# Altium PCB NodeMCU.PcbDoc
Units mm, origin at the board's own origin, x right, y up, seen from the top; angles counter-clockwise.
Board outline 100.36 x 67.08 mm, 2 copper layers (Top Layer, Bottom Layer); 39 components, 39 nets, 222 pads, 17 vias.
Unrouted connection lines stored in the file: 2.
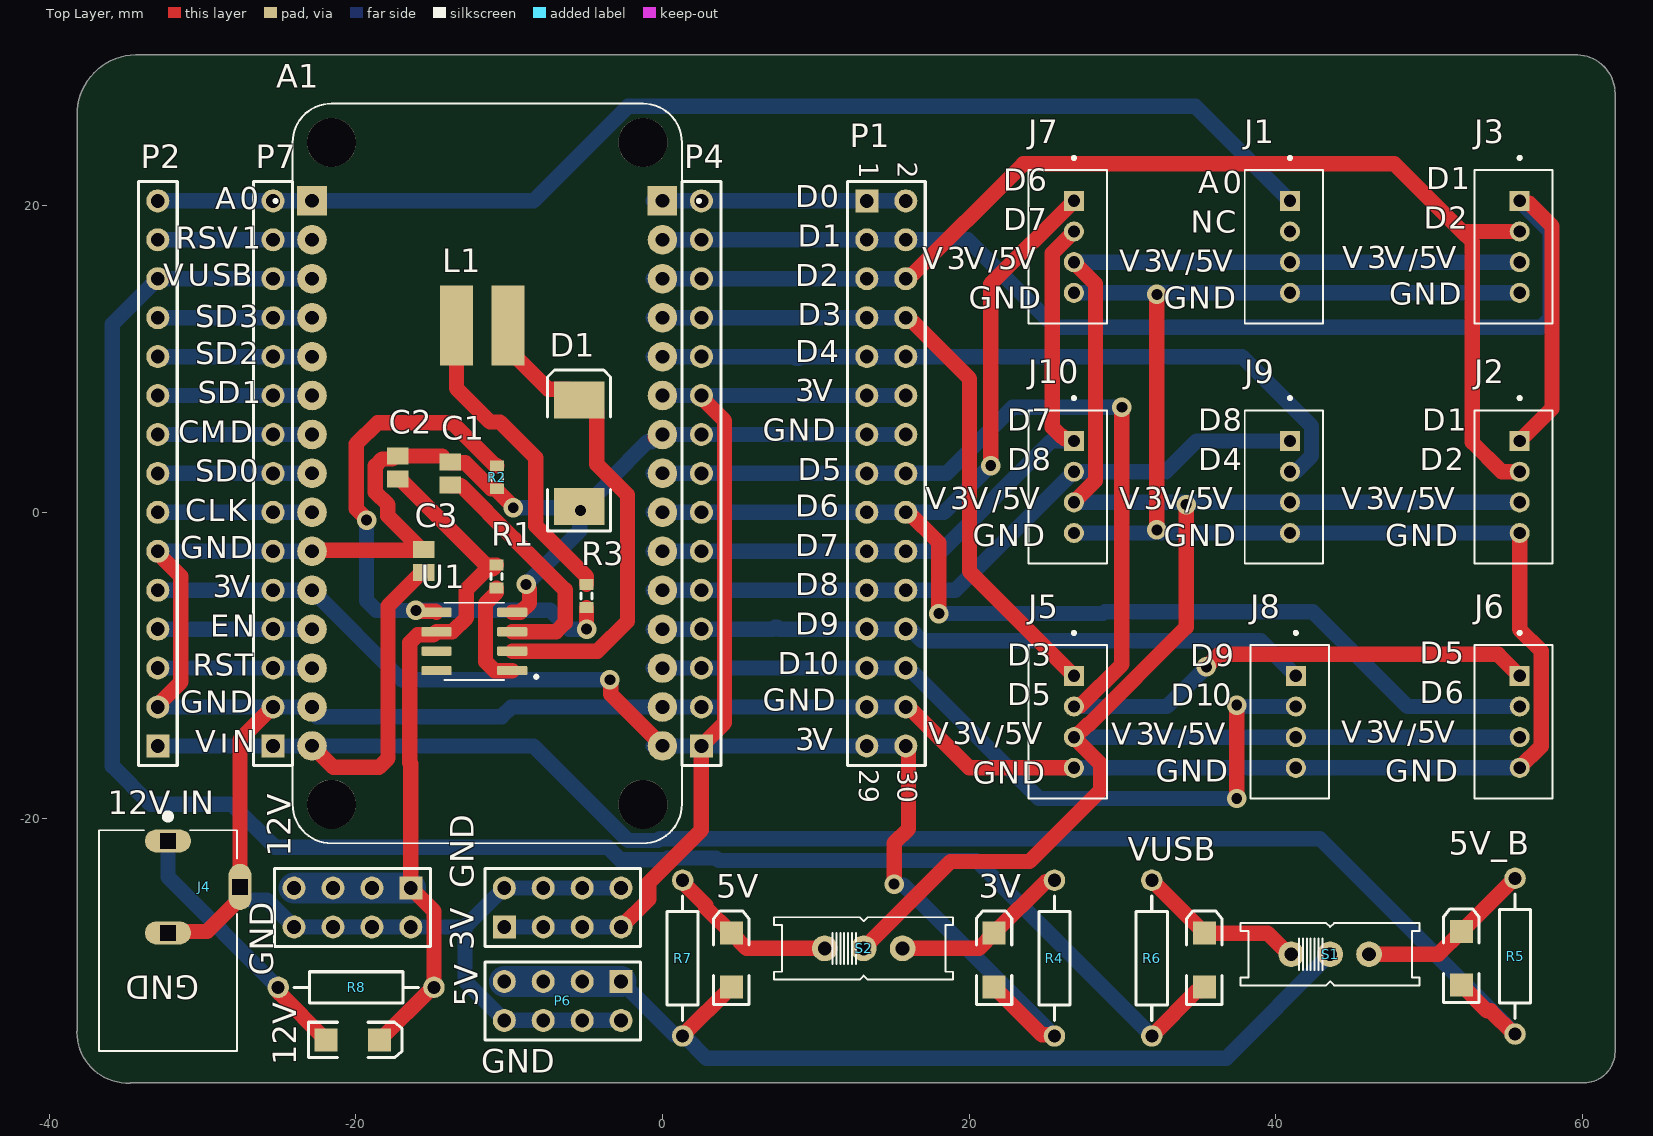
[diagram p0: Top Layer view]
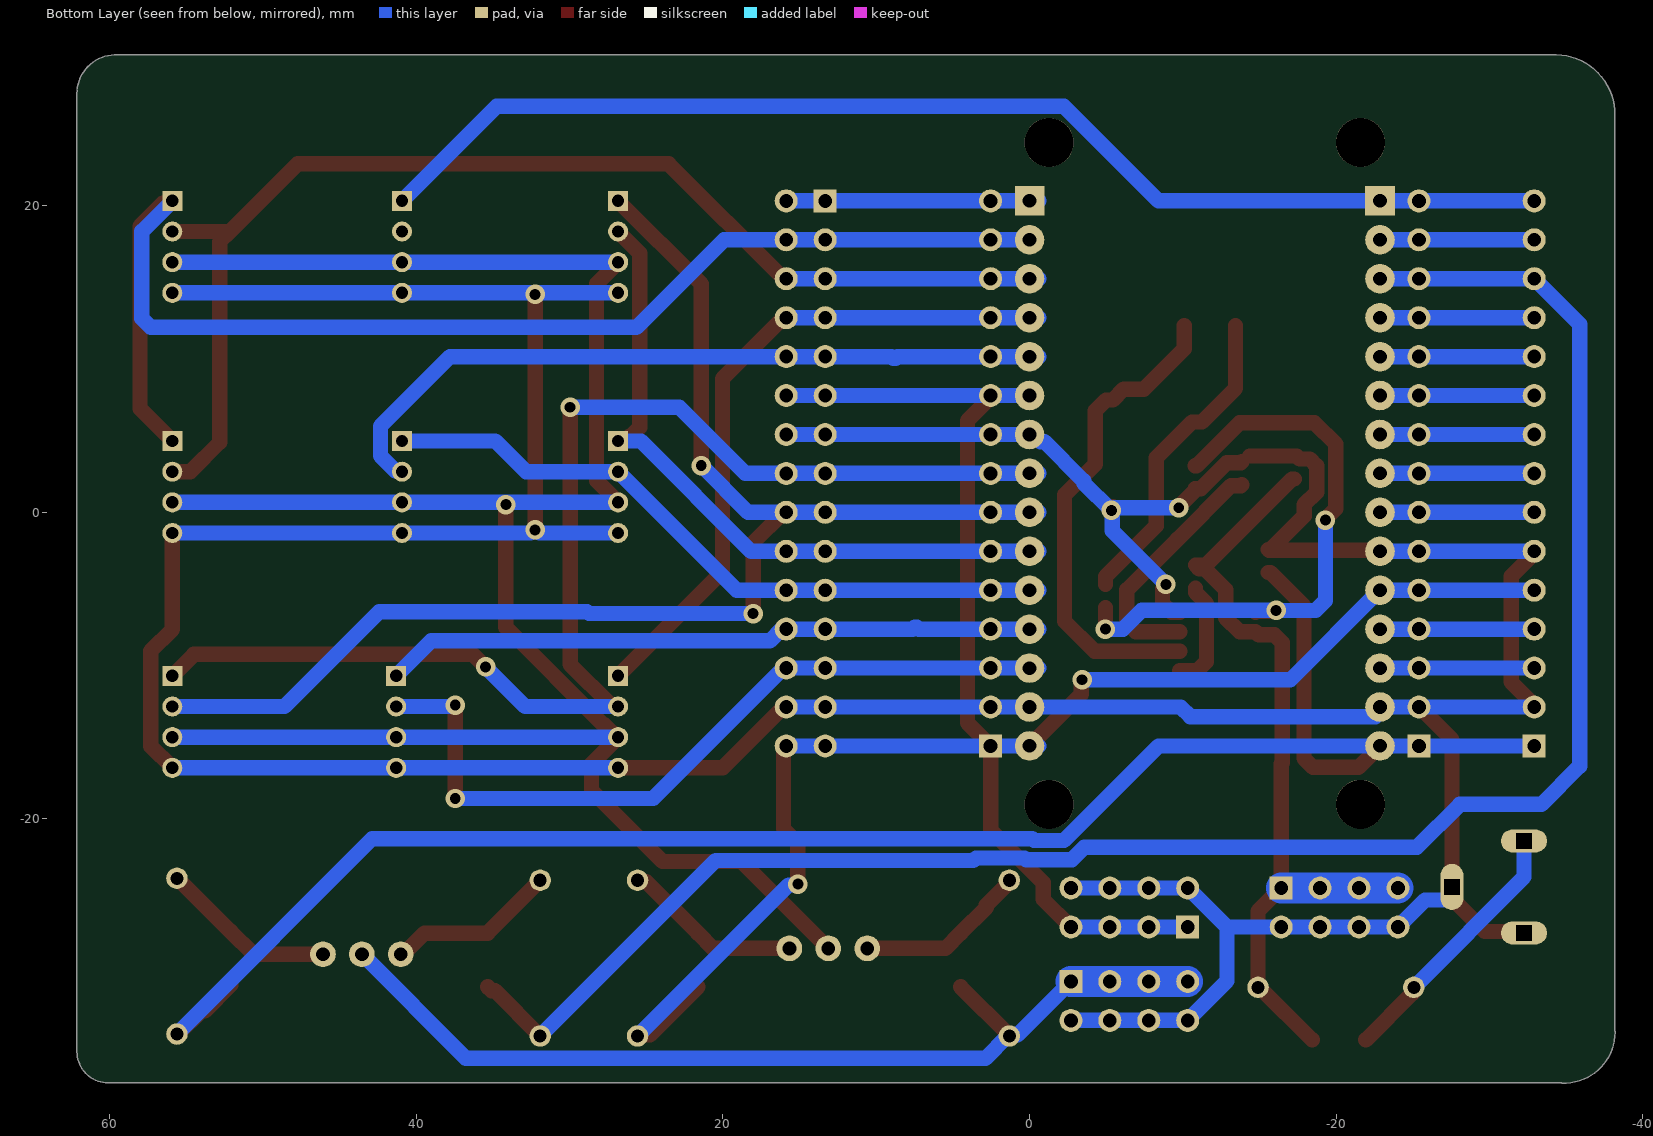
[diagram p1: Bottom Layer view, seen from below]

## Layer stack, top to bottom
Top Solder: solder mask 0.0102, Solder Resist, Dk 3.5
Top Layer: signal copper 0.0356
Dielectric 1: dielectric 0.32, FR-4, Dk 4.8
Bottom Layer: signal copper 0.0356
Bottom Solder: solder mask 0.0102, Solder Resist, Dk 3.5

## Board outline
-38.203,-33.909 ccw(c-34.878,-33.909) -34.745,-37.232 ccw(c-34.75,-37.104) -34.681,-37.211 60.117,-37.211 60.118,-37.211 ccw(c60.118,-35.179) 62.151,-35.179 ccw(c62.023,-35.179) 62.148,-35.155 ccw(c62.023,-35.132) 62.151,-35.132 62.151,27.175 ccw(c59.61,27.305) 62.154,27.305 ccw(c59.61,27.305) 59.48,29.845 -34.37,29.845 ccw(c-34.37,29.718) -34.373,29.845 cw(c-34.371,29.731) -34.372,29.845 -34.373,29.845 ccw(c-34.306,25.971) -38.18,25.907 ccw(c-33.971,25.977) -38.18,25.906 -38.18,25.907 -38.18,-33.836 ccw(c-38.076,-33.909)

## Design rules (kind name [scope] priority, off if disabled: settings)
Clearance [All] p1: gap=0.254 ignorepadtopadclearanceinfootprint=FALSE except(0: Arc-Hole Track-Hole SMDPad-Hole THPad-Hole Via-Hole Fill-Hole Poly-Hole Region-Hole Text-Hole)
ComponentClearance [All] p1 off: gap=0.254 collisioncheckmode=3 verticalgap=0.254 showdistances=FALSE
Height [All] p1 off: minheight=0 maxheight=25.4 prefheight=12.7
PolygonConnect [All] p1: connectstyle=Relief reliefconductorwidth=0.254 reliefentries=4 polygonreliefangle="90 Angle" airgapwidth=0.254
RoutingVias [All] p1: holewidth=0.711 width=1.27 viastyle="Through Hole" minholewidth=0.711 minwidth=1.27 maxholewidth=0.711 maxwidth=1.27
SolderMaskExpansion [All] p1: expansion=0.102 istentingtop=FALSE
Width [All] p1: maxlimit=10 minlimit=0.254 preferedwidth=1 minimp=50.000000 maximp=50.000000 favimp=50.000000
28 further rules are at their usual default settings.

## Classes and differential pairs
component class "node MCU": 3V "5V " 5V_B 12V A1 C1 C2 C3 D1 J1 J2 J3 J4 J5 J6 J7 J8 J9 J10 L1 P1 P2 P4 P6 P7 R1 R2 R3 R4 R5 R6 R7 R8 S1 S2 U1 VUSB

## Components (designator, comment, footprint, x,y, rotation, side; value= is the part's Value field where it differs from the comment)
3V "LED2" 3.2X1.6X1.1 21.637,-29.21 r90 top (schematic designator D2)
3V "Header 4X2" HDR2X4 -10.318,-27.051 r0 top (schematic designator P5)
5V "LED2" 3.2X1.6X1.1 4.492,-29.21 r90 top (schematic designator D5)
5V_B "LED2" 3.2X1.6X1.1 52.117,-29.083 r90 top (schematic designator D3)
12V "LED2" 3.2X1.6X1.1 -20.193,-34.417 r0 top (schematic designator D6)
12V "Header 4X2" HDR2X4 -16.414,-24.511 r180 top (schematic designator P8)
A1 "113990105" SEEED_113990105 -11.43,2.54 r0 top
C1 "Cap Pol3" C0805 -13.843,2.54 r90 top value=100pF
C2 "Cap Pol3" C0805 -17.272,2.921 r270 top value=100pF
C3 "Cap Pol3" C0805 -15.574,-3.175 r90 top value=100pF
D1 "Diode" SMC -5.438,3.856 r90 top
J1 "110990030" SEEED_110990030 40.941,17.32 r270 top
J2 "110990030" SEEED_110990030 55.927,1.651 r270 top
J3 "110990030" SEEED_110990030 55.927,17.32 r270 top
J4 "PJ-102A" CUI_PJ-102A -32.258,-27.94 r270 top
J5 "110990030" SEEED_110990030 26.844,-13.668 r270 top
J6 "110990030" SEEED_110990030 55.927,-13.668 r270 top
J7 "110990030" SEEED_110990030 26.844,17.32 r270 top
J8 "110990030" SEEED_110990030 41.322,-13.668 r270 top
J9 "110990030" SEEED_110990030 40.941,1.651 r270 top
J10 "110990030" SEEED_110990030 26.844,1.651 r270 top
L1 "SD12-4R7-R" INDM5252X120N -11.764,12.192 r0 top
P1 "Header 15X2" HDR2X15 13.335,20.32 r270 top
P2 "Header 15" HDR1X15 -32.924,-15.24 r90 top
P4 "Header 15" HDR1X15 2.54,-15.24 r90 top
P6 "Header 4X2" HDR2X4 -2.698,-30.607 r180 top
P7 "Header 15" HDR1X15 -25.4,-15.24 r90 top
R1 "Res3" J1-0603 -10.822,-4.191 r270 top value=1K
R2 "Res3" J1-0603 -10.795,2.286 r270 top value=1K
R3 "Res3" J1-0603 -4.953,-5.461 r270 top value=1K
R4 "Res2" AXIAL-0.4 25.574,-29.083 r90 top value=1K
R5 "Res2" AXIAL-0.4 55.626,-28.956 r90 top value=1K
R6 "Res2" AXIAL-0.4 31.924,-29.083 r90 top value=1K
R7 "Res2" AXIAL-0.4 1.317,-29.083 r90 top value=1K
R8 "Res2" AXIAL-0.4 -19.986,-30.988 r0 top value=1K
S1 "EG1218" EG1218 43.561,-28.829 r0 top
S2 "EG1218" EG1218 13.128,-28.448 r0 top
U1 "MC34063ADR" SOIC127P599X175-8N -12.272,-8.423 r180 top
VUSB "LED2" 3.2X1.6X1.1 35.353,-29.21 r90 top (schematic designator D4)

## Footprints (in the part's own frame and the unit in brackets; to place one, negate y for a bottom-side part, rotate by r counter-clockwise, add the part's x,y. Pads: shape width x height; smd on the part's side, far side on the other; paste and mask are expansions set on the pad)
3.2X1.6X1.1 [mm] "SMT LED; 2 Flat Leads"
  rect 1.5x1.5 smd: 1(-1.75,0) 2(1.75,0)
  silkscreen extent -2.9,-1.15 3.2,1.15
AXIAL-0.4 [mm] "Axial Device, Thru-Hole; 2 Leads; 0.4 in Pin Spacing"
  round 1.4 hole 0.85: 1(-5.08,0) 2(5.08,0)
  silkscreen extent -4.06,-1.02 4.06,1.02
C0805 [mm] "Chip Capacitor, Body 2.0x1.3mm, IPC High Density"
  rect 1.1x1.4 smd: 1(-0.75,0) 2(0.75,0)
  body extent -1.1,-0.72 1.1,0.72, height 1.4
CUI_PJ-102A [mm]
  oval 1.508x3.016 hole 1 square: 1(-6.5,0) 2(-0.5,0)
  oval 3.016x1.508 hole 1 square: 3(-3.5,4.7)
  silkscreen extent -8.3,-4.5 7.2,4.5, body extent -7.2,-4.5 7.2,4.9, height 11
EG1218 [mil]
  round 66 hole 35.43: O(-100,0) P(0,0) S(100,0)
  silkscreen extent -230,-80 230,80, body extent -228,-276 228,201, height 79
HDR1X15 [mm] "Connector; Header; 15 Position"
  rect 1.5x1.5 hole 0.9: 1(0,0)
  round 1.5 hole 0.9: 2(2.54,0) 3(5.08,0) 4(7.62,0) 5(10.16,0) 6(12.7,0) 7(15.24,0) 8(17.78,0) 9(20.32,0) 10(22.86,0) 11(25.4,0) 12(27.94,0) 13(30.48,0) 14(33.02,0) 15(35.56,0)
  silkscreen extent -1.27,-1.27 36.83,1.27
HDR2X4 [mm] "Connector; Header; 4x2 Position"
  rect 1.5x1.5 hole 0.9: 1(0,0)
  round 1.5 hole 0.9: 2(0,2.54) 3(2.54,0) 4(2.54,2.54) 5(5.08,0) 6(5.08,2.54) 7(7.62,0) 8(7.62,2.54)
  silkscreen extent -1.27,-1.27 8.89,3.81
HDR2X15 [mm] "Connector; Header; 15x2 Position"
  rect 1.5x1.5 hole 0.9: 1(0,0)
  round 1.5 hole 0.9: 2(0,2.54) 3(2.54,0) 4(2.54,2.54) 5(5.08,0) 6(5.08,2.54) 7(7.62,0) 8(7.62,2.54) 9(10.16,0) 10(10.16,2.54) 11(12.7,0) 12(12.7,2.54) 13(15.24,0) 14(15.24,2.54) 15(17.78,0) 16(17.78,2.54) 17(20.32,0) 18(20.32,2.54) 19(22.86,0) 20(22.86,2.54) 21(25.4,0) 22(25.4,2.54) 23(27.94,0) 24(27.94,2.54) 25(30.48,0) 26(30.48,2.54) 27(33.02,0) 28(33.02,2.54) 29(35.56,0) 30(35.56,2.54)
  silkscreen extent -1.27,-1.27 36.83,3.81
INDM5252X120N [mil]
  rect 85x205 smd: 1(-66,0) 2(66,0)
J1-0603 [mm] "Chip Resistor, Body 1.6x0.8mm, IPC High Density"
  rect 0.7x0.9 smd: 1(-0.75,0) 2(0.75,0)
  silkscreen extent -0.2,-0.35 0.2,0.35, body extent -0.85,-0.48 0.85,0.48, height 0.9
SEEED_110990030 [mm]
  rect 1.308x1.308 hole 0.8: 1(-3,0)
  round 1.308 hole 0.8: 2(-1,0) 3(1,0) 4(3,0)
  silkscreen extent -5.9,-2.95 5,2.15
SEEED_113990105 [mm]
  rect 1.93x1.93 / inner round 1.93 / far side rect 1.93x1.93 hole 0.889: J1_1(-11.43,17.78) J2_1(11.43,17.78)
  round 1.93 hole 0.889: J1_2(-11.43,15.24) J1_3(-11.43,12.7) J1_4(-11.43,10.16) J1_5(-11.43,7.62) J1_6(-11.43,5.08) J1_7(-11.43,2.54) J1_8(-11.43,0) J1_9(-11.43,-2.54) J1_10(-11.43,-5.08) J1_11(-11.43,-7.62) J1_12(-11.43,-10.16) J1_13(-11.43,-12.7) J1_14(-11.43,-15.24) J1_15(-11.43,-17.78) J2_2(11.43,15.24) J2_3(11.43,12.7) J2_4(11.43,10.16) J2_5(11.43,7.62) J2_6(11.43,5.08) J2_7(11.43,2.54) J2_8(11.43,0) J2_9(11.43,-2.54) J2_10(11.43,-5.08) J2_11(11.43,-7.62) J2_12(11.43,-10.16) J2_13(11.43,-12.7) J2_14(11.43,-15.24) J2_15(11.43,-17.78)
  round 3.2 hole 3.2 unplated: ""(-10.16,-21.59) ""(-10.16,21.59) ""(10.16,-21.59) ""(10.16,21.59)
  silkscreen extent -13.91,-24.13 13.91,24.13
SMC [mm] "DO-214-AB/SMC; 2 C-Bend Leads; Body 7.9 x 5.9 mm, inc. leads (LxW)"
  rect 2.4x3.3 smd: 1(-3.475,0) 2(3.475,0)
  silkscreen extent -5.07,-2.05 5.43,2.05
SOIC127P599X175-8N [mm]
  rrect25% 1.97x0.6 smd: 1(-2.47,1.905) 2(-2.47,0.635) 3(-2.47,-0.635) 4(-2.47,-1.905) 5(2.47,-1.905) 6(2.47,-0.635) 7(2.47,0.635) 8(2.47,1.905)
  silkscreen extent -4.14,-2.52 1.95,2.52

## Part data
3V 5V 5V_B 12V VUSB: "Typical RED, GREEN, YELLOW, AMBER GaAs LED", LatestRevisionDate=17-Jul-2002, LatestRevisionNote="Re-released for DXP Platform.", PackageDescription="SM LED; 2 Flat Leads", PackageReference=3.2X1.6X1.1, PackageVersion=Feb-2002, Published=8-Jun-2000, Publisher="Altium Limited"
3V 12V P6: "Header, 4-Pin, Dual row", LatestRevisionDate=17-Jul-2002, LatestRevisionNote="Re-released for DXP Platform.", Publisher="Altium Limited"
A1: "- ESP8266 Transceiver; 802.11 b/g (Wi-Fi, WiFi, WLAN) 2.4GHz Evaluation Board", Package=None, Availability="In Stock", Check_prices=https://www.snapeda.com/parts/113990105/Seeed+Technology+Co.%252C+Ltd/view-part/?ref=eda, MF="Seeed Technology Co., Ltd", MP=113990105, Price=None, Purchase-URL=https://pricing.snapeda.com/search/part/113990105/?ref=eda, SnapEDA_Link=https://www.snapeda.com/parts/113990105/Seeed+Technology+Co.%252C+Ltd/view-part/?ref=snap
C1 C2 C3: "Polarized Capacitor (Surface Mount)", LatestRevisionDate=29-May-2009, LatestRevisionNote="IPC-7351 Footprint Added.", PackageDescription="Chip Capacitor", PackageReference=C0805, Published=8-Jun-2000, Publisher="Altium Limited"
D1: "Default Diode", Code_JEDEC=DO-214-AB, LatestRevisionDate=17-Jul-2002, LatestRevisionNote="Re-released for DXP Platform.", PackageDescription="DO-214-AB/SMC; 2 C-Bend Leads; Body 7.9 x 5.9 mm, inc. leads (LxW)", PackageReference=SMC, PackageVersion=Sep-1996, Published=8-Jun-2000, Publisher="Altium Limited"
J1 J2 J3 J5 J6 J7 J8 J9 J10: "GROVE 2MM 4PIN VERT CONN 10PCS", Package=None, Arrow_Electronics-Purchase-URL=https://snapeda.com/shop?store=Arrow+Electronics&id=583576, Availability=Good, MF="Seeed Technology", Mouser-Purchase-URL=https://snapeda.com/shop?store=Mouser&id=583576, MP=110990030, Price=None, SnapEDA_Link=https://www.snapeda.com/parts/110990030/Seeed%20Technology%20Co.,%20Ltd/view-part/583576/?ref=snap
J4: "2.0 x 6.5 mm, 2.5 A, Horizontal, Through Hole, Tapered Pins, Dc Power Jack Connector", Package=None, Availability="In Stock", Check_prices=https://www.snapeda.com/parts/PJ-102A/CUI+Devices/view-part/?ref=eda, CUI_purchase_URL=https://www.cuidevices.com/product/interconnect/connectors/dc-power-connectors/jacks/pj-102a?utm_source=snapeda.com&utm_medium=referral&utm_campaign=snapedaBOM, MF="CUI Devices", MP=PJ-102A, Price=None, Purchase-URL=https://pricing.snapeda.com/search/part/PJ-102A/?ref=eda, SnapEDA_Link=https://www.snapeda.com/parts/PJ-102A/CUI+Devices/view-part/?ref=snap
L1: "POWER INDUCTOR", Package=None, Availability=Unavailable, MP=SD12-4R7-R, Price=None
P1: "Header, 15-Pin, Dual row", LatestRevisionDate=17-Jul-2002, LatestRevisionNote="Re-released for DXP Platform.", Publisher="Altium Limited"
P2 P4 P7: "Header, 15-Pin", LatestRevisionDate=17-Jul-2002, LatestRevisionNote="Re-released for DXP Platform.", Publisher="Altium Limited"
R1 R2 R3 R4 R5 R6 R7 R8: "Resistor", Published=8-Jun-2000, Publisher="Altium Limited"
  R1 R2 R3: LatestRevisionDate=29-May-2009, LatestRevisionNote="IPC-7351 Footprint Added.", PackageDescription="Chip Resistor", PackageReference=J1-0603
  R4 R5 R6 R7 R8: LatestRevisionDate=17-Jul-2002, LatestRevisionNote="Re-released for DXP Platform.", PackageDescription="Axial Device, Thru-Hole; 2 Leads; 0.4 in Pin Spacing", PackageReference=AXIAL-0.4
S1 S2: "Slide Switch SPDT Through Hole", Package=None, Availability="In Stock", Check_prices=https://www.snapeda.com/parts/EG1218/E-Switch/view-part/?ref=eda, MF=E-Switch, MP=EG1218, Price=None, Purchase-URL=https://pricing.snapeda.com/search/part/EG1218/?ref=eda, SnapEDA_Link=https://www.snapeda.com/parts/EG1218/E-Switch/view-part/?ref=snap
U1: "1.5-A Boost/Buck/Inverting Switching Regulator 8-SOIC 0 to 70", Package=None, Availability=Unavailable, MP=MC34063ADR, Price=None

## Via types
v1: diameter 1.27, hole 0.711, Top Layer to Bottom Layer, 17 vias

## Nets (pads, with @x,y where several pads share a name; then routed paths per layer and width w, separated by ;. In a path a pad name is that pad's centre, name@x,y a point inside that pad or via, vN(x,y) a via of type N, cw(c..) or ccw(c..) an arc to the next point about the centre after c; other vN are vias at no path point)
GND: 3V.2@-10.318,-24.511 3V.4 3V.6 3V.8 12V.2@-16.414,-27.051 12V.4 12V.6 12V.8 A1.J1_10 A1.J1_14 A1.J2_7 A1.J2_14 C1.2 C2.1 C3.2 D1.1 J1.4 J2.4 J3.4 J4.2 J4.3 J5.4 J6.4 J7.4 J8.4 J9.4 J10.4 P1.13 P1.14 P1.27 P1.28 P2.2 P2.6 P4.2 P4.9 P6.2 P6.4 P6.6 P6.8 P7.2 P7.6 R2.2 U1.4 | length 325.4
  Top Layer w1: P2.2 -32.924,-12.565 -31.42,-11.061 -31.42,-4.179 -32.924,-2.675 P2.6 ; J4.2 -32.161,-27.343 -29.707,-27.343 -27.558,-25.194 J4.3 -27.558,-14.832 -25.426,-12.7 P7.2 ; A1.J1_10 -22.795,-2.475 -15.624,-2.475 C3.2 -15.724,-2.425 -17.915,-0.234 -17.915,0.498 -18.726,1.309 -18.726,3.033 -18.284,3.475 -17.618,3.475 -17.422,3.671 C2.1 C1.2@-14.374,3.671 ; C1.2 -13.793,3.24 -12.865,3.24 -11.161,1.536 R2.2 -10.795,1.434 -9.734,0.372 v1(-9.734,0.299) ; U1.4 -9.262,-6.518 -8.676,-5.932 -8.676,-4.986 -8.89,-4.772 v1(-8.89,-4.699) ; D1.1 -5.334,0.277 v1(-5.334,0.127) ; A1.J2_7@-0.467,4.902 -0.178,4.902 A1.J2_7 ; P1.28@16.049,-12.7 20.017,-16.668 J5.4 ; v1(32.258,-1.143) v1(32.258,14.224) ; J6.4 55.927,-16.659 57.335,-15.251 57.335,-9.046 55.927,-7.638 J2.4
  Bottom Layer w1: P2.2 P7.2 -23.208,-12.7 -22.573,-13.335 -10.494,-13.335 -9.859,-12.7 A1.J2_14 P4.2 13.509,-12.7 P1.28@16.049,-12.7 ; P2.6 P7.6 A1.J1_10@-23.46,-2.54 ; J4.3 -27.558,-25.057 -27.323,-25.291 -25.794,-25.291 12V.8 12V.6 12V.4 -16.414,-27.051 -12.884,-27.051 ; v1(-9.734,0.299) -5.579,0.299 -5.407,0.127 v1(-5.334,0.127) ; v1(-8.89,-4.699) -5.386,-1.195 -5.386,0.075 v1(-5.334,0.127) ; P6.2 P6.4 P6.6 P6.8 -12.884,-30.581 -12.884,-27.051 ; 3V.8 3V.6 3V.4 -10.318,-24.511 -10.344,-24.511 -12.884,-27.051 ; P1.14@16.049,5.08 13.509,5.08 P4.9 -0.252,5.08 -0.717,4.615 -0.973,4.615 -3.534,2.054 -3.534,1.927 v1(-5.334,0.127) ; J5.4 J8.4 J6.4 ; J10.4 31.979,-1.349 32.185,-1.143 32.331,-1.143 32.537,-1.349 J9.4 J2.4 ; J7.4 32.089,14.32 32.185,14.224 v1(32.258,14.224) 32.331,14.224 32.427,14.32 J1.4 J3.4
NetA1_J1_1: A1.J1_1 J1.1 P2.15 P7.15 | length 78.4
  Bottom Layer w1: P2.15 P7.15 A1.J1_1@-23.46,20.32 ; A1.J1_1 -8.409,20.32 -2.245,26.484 34.777,26.484 J1.1
NetA1_J1_2: A1.J1_2 P2.14 P7.14 | length 9.5
  Bottom Layer w1: P2.14 -26,17.78 A1.J1_2@-23.46,17.78
NetA1_J1_3: A1.J1_3 P2.13 P7.13 R6.1 VUSB.1 | length 123
  Top Layer w1: R6.1 34.877,-31.21 35.103,-31.21 VUSB.1
  Bottom Layer w1: A1.J1_3 P7.13 P2.13 -35.886,12.278 -35.886,-16.565 -33.401,-19.05 -28.067,-19.05 -25.273,-21.844 -3.578,-21.844 -2.764,-22.658 0.224,-22.658 0.333,-22.549 3.499,-22.549 3.667,-22.717 20.478,-22.717 R6.1
NetA1_J1_4: A1.J1_4 P2.12 P7.12 | length 9.5
  Bottom Layer w1: P2.12 -26,12.7 A1.J1_4@-23.46,12.7
NetA1_J1_5: A1.J1_5 P2.11 P7.11 | length 9.5
  Bottom Layer w1: P2.11 -26,10.16 A1.J1_5@-23.46,10.16
NetA1_J1_6: A1.J1_6 P2.10 P7.10 | length 9.5
  Bottom Layer w1: P2.10 -26,7.62 A1.J1_6@-23.46,7.62
NetA1_J1_7: A1.J1_7 P2.9 P7.9 | length 9.5
  Bottom Layer w1: P2.9 -26,5.08 A1.J1_7@-23.46,5.08
NetA1_J1_8: A1.J1_8 P2.8 P7.8 | length 9.5
  Bottom Layer w1: P2.8 -26,2.54 A1.J1_8@-23.46,2.54
NetA1_J1_9: A1.J1_9 P2.7 P7.7 | length 9.5
  Bottom Layer w1: P2.7 -26,0 A1.J1_9@-23.46,0
NetA1_J1_11: 3V.1 3V.3 3V.5 3V.7 A1.J1_11 A1.J2_6 A1.J2_15 P1.11 P1.12 P1.29 P1.30 P2.5 P4.1 P4.10 P7.5 R4.1 | length 145.3
  Top Layer w1: v1(-3.429,-10.922) -3.377,-10.974 -3.377,-11.863 A1.J2_15 ; 3V.7 -0.889,-25.242 -0.889,-24.153 2.54,-20.724 P4.1 4.044,-13.736 4.044,5.981 2.54,7.485 P4.10 ; v1(15.113,-24.257) 15.113,-21.582 16.049,-20.646 P1.30@16.049,-15.24 ; 3V.1@21.637,-30.96 24.764,-34.086 25.498,-34.086 R4.1
  Bottom Layer w1: P2.5 P7.5 A1.J1_11 -17.018,-10.922 v1(-3.429,-10.922) ; 3V.1@-10.318,-27.051 3V.3 3V.5 3V.7 ; A1.J2_15@-0.6,-15.24 A1.J2_15 P4.1 13.509,-15.24 P1.30@16.049,-15.24 ; A1.J2_6 P4.10 13.509,7.62 P1.12@16.049,7.62 ; v1(15.113,-24.257) 15.165,-24.309 15.72,-24.309 R4.1
NetA1_J1_12: A1.J1_12 P2.4 P7.4 | length 9.5
  Bottom Layer w1: P2.4 -26,-7.62 A1.J1_12@-23.46,-7.62
NetA1_J1_13: A1.J1_13 P2.3 P7.3 | length 9.5
  Bottom Layer w1: P2.3 -26,-10.16 A1.J1_13@-23.46,-10.16
NetA1_J1_15: 5V_B.1 A1.J1_15 C3.1 P2.1 P7.1 R5.1 | length 119.6
  Top Layer w1: A1.J1_15 -21.463,-16.637 -18.493,-16.637 -17.907,-16.051 -17.907,-6.108 -15.724,-3.925 C3.1 ; 5V_B.1 53.805,-32.521 54.03,-32.521 55.544,-34.036 R5.1
  Bottom Layer w1: P2.1 P7.1 A1.J1_15@-23.46,-15.24 ; A1.J1_15 -8.409,-15.24 -2.245,-21.404 -0.295,-21.404 -0.186,-21.295 42.885,-21.295 R5.1
NetA1_J2_1: A1.J2_1 P1.1 P1.2 P4.15 | length 16.6
  Bottom Layer w1: A1.J2_1@-0.6,20.32 1.94,20.32 13.509,20.32 P1.2@16.049,20.32
NetA1_J2_2: A1.J2_2 J2.1 J3.1 P1.3 P1.4 P4.14 | length 86.7
  Top Layer w1: J2.1 58.039,6.763 58.039,18.669 56.542,20.166 56.081,20.166 J3.1
  Bottom Layer w1: A1.J2_2 P4.14 13.509,17.78 16.049,17.78 19.939,17.78 25.654,12.065 57.326,12.065 57.912,12.651 57.912,18.335 J3.1
NetA1_J2_3: A1.J2_3 J2.2 J3.2 P1.5 P1.6 P4.13 | length 79.3
  Top Layer w1: P1.6@16.049,15.24 23.542,22.733 47.752,22.733 52.165,18.32 ; J2.2@55.844,2.651 54.753,2.651 52.832,4.572 52.832,17.653 52.165,18.32 ; J3.2 52.165,18.32
  Bottom Layer w1: A1.J2_3@-0.6,15.24 13.509,15.24 P1.6@16.049,15.24
NetA1_J2_4: A1.J2_4 J5.1 P1.7 P1.8 P4.12 | length 44.7
  Top Layer w1: P1.8@16.049,12.7 20.028,8.721 20.028,-3.852 J5.1
  Bottom Layer w1: A1.J2_4@-0.6,12.7 13.509,12.7 P1.8@16.049,12.7 ; J5.1 J5.1@26.971,-10.541
NetA1_J2_5: A1.J2_5 J9.2 P1.9 P1.10 P4.11 | length 48.3
  Bottom Layer w1: A1.J2_5@-0.6,10.16 8.61,10.16 ; 8.737,10.033 8.883,10.033 ; 9.01,10.16 13.509,10.16 16.049,10.16 37.806,10.16 42.349,5.617 42.349,3.685 41.374,2.71 41,2.71 J9.2
NetA1_J2_8: A1.J2_8 J5.2 J6.1 P1.15 P1.16 P4.8 | length 84.5
  Top Layer w1: J5.2 26.903,-12.609 27.277,-12.609 29.972,-9.914 v1(29.972,6.858) ; v1(35.486,-10.086) 36.312,-9.26 54.519,-9.26 J6.1
  Bottom Layer w1: A1.J2_8@-0.6,2.54 A1.J2_8 P4.8 13.509,2.54 16.049,2.54 18.542,2.54 22.86,6.858 v1(29.972,6.858) ; J5.2 32.904,-12.668 v1(35.486,-10.086)
NetA1_J2_9: A1.J2_9 J6.2 J7.1 P1.17 P1.18 P4.7 | length 90.7
  Top Layer w1: P1.18@16.049,0 18.034,-1.985 v1(18.034,-6.604) ; v1(21.417,3.048) 21.417,14.893 J7.1
  Bottom Layer w1: A1.J2_9@-0.6,0 A1.J2_9 P4.7 13.509,0 16.049,0 16.052,0.003 18.372,0.003 v1(21.417,3.048) ; v1(18.034,-6.604) 28.743,-6.604 28.87,-6.477 42.418,-6.477 48.609,-12.668 J6.2
NetA1_J2_10: A1.J2_10 J7.2 J10.1 P1.19 P1.20 P4.6 | length 45.6
  Top Layer w1: J10.1 26.69,4.805 26.252,4.805 26.104,4.953 26.022,4.953 25.436,5.539 25.436,16.903 26.844,18.311 J7.2
  Bottom Layer w1: A1.J2_10@-0.6,-2.54 13.509,-2.54 18.161,-2.54 25.352,4.651 J10.1
NetA1_J2_11: A1.J2_11 J9.1 J10.2 P1.21 P1.22 P4.5 | length 45.6
  Bottom Layer w1: A1.J2_11@-0.6,-5.08 A1.J2_11 P4.5 13.509,-5.08 16.049,-5.08 19.113,-5.08 J10.2 32.857,2.651 34.857,4.651 J9.1
NetA1_J2_12: A1.J2_12 J8.1 P1.23 P1.24 P4.4 | length 43.3
  Bottom Layer w1: A1.J2_12@-0.6,-7.62 7.213,-7.62 7.34,-7.493 7.486,-7.493 7.613,-7.62 13.509,-7.62 16.184,-7.62 16.946,-8.382 39.036,-8.382 J8.1
NetA1_J2_13: A1.J2_13 J8.2 P1.25 P1.26 P4.3 | length 51.6
  Top Layer w1: v1(37.465,-18.669) v1(37.465,-12.573)
  Bottom Layer w1: A1.J2_13@-0.6,-10.16 13.509,-10.16 16.049,-10.16 24.558,-18.669 v1(37.465,-18.669) ; v1(37.465,-12.573) 37.56,-12.668 J8.2
NetC1_1: C1.1 U1.3 | length 16.2
  Top Layer w1: C1.1 -13.793,1.74 -13.139,1.74 -9.64,-1.759 -6.342,-5.057 -6.342,-7.202 -6.928,-7.788 U1.3
NetC2_2: 12V.1@-16.414,-24.511 12V.2@-18.443,-34.417 12V.3 12V.5 12V.7 C2.2 R1.1 R8.2 U1.6 | length 53.3
  Top Layer w1: 12V.2@-18.443,-34.417 -15.014,-30.988 R8.2 -14.906,-26.019 -16.414,-24.511 -16.414,-16.409 -16.481,-16.342 -16.481,-8.489 -15.979,-7.988 -14.942,-7.988 U1.6 -13.704,-7.788 -12.795,-6.878 -12.795,-5.048 -11.434,-3.687 -11.068,-3.687 R1.1 -11.51,-3.441 -17.122,2.171 C2.2
  Bottom Layer w2: 12V.7 12V.5 12V.3 12V.1@-16.414,-24.511
NetD1_2: D1.2 L1.2 U1.2 | length 31.9
  Top Layer w1: L1.2 -10.087,10.668 -7.45,8.031 -6.138,8.031 D1.2 -4.988,7.331 -4.288,6.631 -4.288,3.147 -2.28,1.139 -2.28,-7.106 -4.232,-9.058 U1.2
NetD2_2: 3V.2@21.637,-27.46 R4.2 S2.S | length 11.7
  Top Layer w1: S2.S 20.649,-28.448 21.637,-27.46 25.018,-24.08 25.498,-24.08 R4.2
NetD3_2: 5V_B.2 R5.2 S1.S | length 11.6
  Top Layer w1: S1.S 50.621,-28.829 5V_B.2 55.574,-23.876 R5.2
NetD4_2: R6.2 S1.O VUSB.2 | length 11.1
  Top Layer w1: R6.2 31.924,-24.031 VUSB.2 39.469,-27.46 40.838,-28.829 S1.O
NetD5_1: 5V.1 P6.1 P6.3 P6.5 P6.7 R7.1 S1.P | length 63.3
  Top Layer w1: R7.1 1.317,-34.135 5V.1
  Bottom Layer w1: P6.1 0.782,-34.086 1.241,-34.086 R7.1 1.425,-34.163 2.879,-35.617 36.773,-35.617 S1.P
  Bottom Layer w2: P6.7 P6.5 P6.3 P6.1
NetD5_2: 5V.2 R7.2 S2.O | length 11.3
  Top Layer w1: R7.2 1.317,-24.111 2.818,-25.612 2.818,-25.786 5V.2 5.48,-28.448 S2.O
NetD6_1: 12V.1@-21.943,-34.417 J4.1 R8.1 | length 17.2
  Top Layer w1: R8.1 -24.99,-31.065 -24.99,-31.37 12V.1@-21.943,-34.417
  Bottom Layer w1: J4.1 -32.258,-23.796 R8.1
NetJ1_2: J1.2
NetJ1_3: J1.3 J2.3 J3.3 J5.3 J6.3 J7.3 J8.3 J9.3 J10.3 S2.P | length 146.3
  Top Layer w1: S2.P 18.791,-22.785 23.951,-22.785 28.575,-18.161 28.575,-16.408 26.844,-14.677 J5.3 26.927,-14.668 27.732,-13.863 27.797,-13.863 34.163,-7.497 v1(34.163,0.508) ; J10.3 26.844,0.66 28.252,2.068 28.252,14.903 26.844,16.311 J7.3
  Bottom Layer w1: J5.3 J8.3 J6.3 ; J10.3 J9.3 J2.3 ; J7.3 J1.3 J3.3
NetL1_1: L1.1 R3.1 | length 20.8
  Top Layer w1: L1.1 -13.44,8.089 -11.245,5.893 -10.596,5.893 -8.255,3.552 -8.255,-0.889 -4.953,-4.191 R3.1
NetR1_2: R1.2 U1.1 U1.7 U1.8 | length 7.1
  Top Layer w1: R1.2 -10.822,-5.23 -11.541,-5.949 -11.541,-9.742 -10.955,-10.328 U1.1
NetR2_1: R2.1 R3.2 U1.5 | length 39.3
  Top Layer w1: v1(-19.304,-0.508) -19.304,-0.435 -19.98,0.241 -19.98,4.453 -18.591,5.842 -13.694,5.842 -10.888,3.036 R2.1 ; v1(-16.086,-6.399) -16.035,-6.45 -14.809,-6.45 U1.5 ; v1(-4.953,-7.62) R3.2
  Bottom Layer w1: v1(-19.304,-0.508) -19.304,-5.764 -18.667,-6.402 -16.089,-6.402 v1(-16.086,-6.399) ; v1@-16.037,-6.399 -7.317,-6.399 -6.096,-7.62 v1(-4.953,-7.62)
pads on no net: A1.

## Silkscreen, mask and mechanical layers (free items; w line width, h text height)
Top Overlay:
  text "D" at 49.838,20.574 h2.49
  text "1" at 51.439,20.574 h2.49
  text "D" at 22.245,20.48 h2.49
  text "6" at 23.846,20.48 h2.49
  text "A" at 34.945,20.32 h2.49
  text "0" at 36.546,20.32 h2.49
  text "D" at 8.651,19.398 h2.49
  text "0" at 10.253,19.398 h2.49
  text "A" at -29.19,19.27 h2.49
  text "0" at -27.589,19.27 h2.49
  text "D" at 49.677,18.011 h2.49
  text "2" at 51.278,18.011 h2.49
  text "D" at 22.245,17.917 h2.49
  text "7" at 23.846,17.917 h2.49
  text "N" at 34.462,17.757 h2.49
  text "C" at 36.064,17.757 h2.49
  text "D" at 8.812,16.835 h2.49
  text "1" at 10.414,16.835 h2.49
  text "R" at -31.765,16.707 h2.49
  text "S" at -30.324,16.707 h2.49
  text "V" at -29.042,16.707 h2.49
  text "1" at -27.44,16.707 h2.49
  text "V" at 44.366,15.448 h2.49
  text "3" at 45.968,15.448 h2.49
  text "V" at 47.089,15.448 h2.49
  text "/" at 48.691,15.448 h2.49
  text "5" at 49.331,15.448 h2.49
  text "V" at 50.453,15.448 h2.49
  text "V" at 16.934,15.354 h2.49
  text "3" at 18.536,15.354 h2.49
  text "V" at 19.657,15.354 h2.49
  text "/" at 21.259,15.354 h2.49
  text "5" at 21.899,15.354 h2.49
  text "V" at 23.021,15.354 h2.49
  text "V" at 29.795,15.194 h2.49
  text "3" at 31.396,15.194 h2.49
  text "V" at 32.518,15.194 h2.49
  text "/" at 34.12,15.194 h2.49
  text "5" at 34.76,15.194 h2.49
  text "V" at 35.882,15.194 h2.49
  text "V" at -32.57,14.305 h2.49
  text "U" at -30.968,14.305 h2.49
  text "S" at -29.366,14.305 h2.49
  text "B" at -28.085,14.305 h2.49
  text "D" at 8.651,14.272 h2.49
  text "2" at 10.253,14.272 h2.49
  text "G" at 47.423,13.045 h2.49
  text "N" at 49.025,13.045 h2.49
  text "D" at 50.627,13.045 h2.49
  text "G" at 19.991,12.791 h2.49
  text "N" at 21.593,12.791 h2.49
  text "D" at 23.195,12.791 h2.49
  text "G" at 32.691,12.791 h2.49
  text "N" at 34.293,12.791 h2.49
  text "D" at 35.895,12.791 h2.49
  text "D" at 8.812,11.709 h2.49
  text "3" at 10.414,11.709 h2.49
  text "S" at -30.478,11.581 h2.49
  text "D" at -29.196,11.581 h2.49
  text "3" at -27.595,11.581 h2.49
  text "D" at 8.651,9.307 h2.49
  text "4" at 10.253,9.307 h2.49
  text "S" at -30.478,9.179 h2.49
  text "D" at -29.196,9.179 h2.49
  text "2" at -27.595,9.179 h2.49
  text "3" at 8.651,6.744 h2.49
  text "V" at 9.773,6.744 h2.49
  text "S" at -30.317,6.616 h2.49
  text "D" at -29.035,6.616 h2.49
  text "1" at -27.434,6.616 h2.49
  text "D" at 22.499,4.826 h2.49
  text "7" at 24.1,4.826 h2.49
  text "D" at 34.945,4.826 h2.49
  text "8" at 36.546,4.826 h2.49
  text "D" at 49.584,4.826 h2.49
  text "1" at 51.185,4.826 h2.49
  text "G" at 6.559,4.181 h2.49
  text "N" at 8.161,4.181 h2.49
  text "D" at 9.763,4.181 h2.49
  text "C" at -31.604,4.053 h2.49
  text "M" at -30.163,4.053 h2.49
  text "D" at -28.241,4.053 h2.49
  text "D" at 22.499,2.263 h2.49
  text "8" at 24.1,2.263 h2.49
  text "D" at 34.945,2.263 h2.49
  text "4" at 36.546,2.263 h2.49
  text "D" at 49.423,2.263 h2.49
  text "2" at 51.024,2.263 h2.49
  text "D" at 8.812,1.618 h2.49
  text "5" at 10.414,1.618 h2.49
  text "S" at -30.478,1.49 h2.49
  text "D" at -29.196,1.49 h2.49
  text "0" at -27.595,1.49 h2.49
  text "V" at 17.188,-0.3 h2.49
  text "3" at 18.79,-0.3 h2.49
  text "V" at 19.911,-0.3 h2.49
  text "/" at 21.513,-0.3 h2.49
  text "5" at 22.153,-0.3 h2.49
  text "V" at 23.275,-0.3 h2.49
  text "V" at 29.795,-0.3 h2.49
  text "3" at 31.396,-0.3 h2.49
  text "V" at 32.518,-0.3 h2.49
  text "/" at 34.12,-0.3 h2.49
  text "5" at 34.76,-0.3 h2.49
  text "V" at 35.882,-0.3 h2.49
  text "V" at 44.273,-0.3 h2.49
  text "3" at 45.874,-0.3 h2.49
  text "V" at 46.996,-0.3 h2.49
  text "/" at 48.598,-0.3 h2.49
  text "5" at 49.238,-0.3 h2.49
  text "V" at 50.36,-0.3 h2.49
  text "D" at 8.651,-0.785 h2.49
  text "6" at 10.253,-0.785 h2.49
  text "C" at -31.122,-1.073 h2.49
  text "L" at -29.68,-1.073 h2.49
  text "K" at -28.398,-1.073 h2.49
  text "G" at 20.245,-2.703 h2.49
  text "N" at 21.847,-2.703 h2.49
  text "D" at 23.449,-2.703 h2.49
  text "G" at 32.691,-2.703 h2.49
  text "N" at 34.293,-2.703 h2.49
  text "D" at 35.895,-2.703 h2.49
  text "G" at 47.169,-2.703 h2.49
  text "N" at 48.771,-2.703 h2.49
  text "D" at 50.373,-2.703 h2.49
  text "D" at 8.651,-3.348 h2.49
  text "7" at 10.253,-3.348 h2.49
  text "G" at -31.444,-3.476 h2.49
  text "N" at -29.842,-3.476 h2.49
  text "D" at -28.24,-3.476 h2.49
  text "D" at 8.651,-5.911 h2.49
  text "8" at 10.253,-5.911 h2.49
  text "3" at -29.351,-6.039 h2.49
  text "V" at -28.23,-6.039 h2.49
  text "D" at 8.651,-8.474 h2.49
  text "9" at 10.253,-8.474 h2.49
  text "E" at -29.512,-8.602 h2.49
  text "N" at -28.071,-8.602 h2.49
  text "D" at 49.423,-10.381 h2.49
  text "5" at 51.024,-10.381 h2.49
  text "D" at 22.499,-10.508 h2.49
  text "3" at 24.1,-10.508 h2.49
  text "D" at 34.437,-10.541 h2.49
  text "9" at 36.038,-10.541 h2.49
  text "D" at 7.525,-11.037 h2.49
  text "1" at 9.126,-11.037 h2.49
  text "0" at 10.248,-11.037 h2.49
  text "R" at -30.639,-11.165 h2.49
  text "S" at -29.197,-11.165 h2.49
  text "T" at -27.916,-11.165 h2.49
  text "D" at 49.423,-12.944 h2.49
  text "6" at 51.024,-12.944 h2.49
  text "D" at 22.499,-13.071 h2.49
  text "5" at 24.1,-13.071 h2.49
  text "D" at 33.149,-13.104 h2.49
  text "1" at 34.751,-13.104 h2.49
  text "0" at 35.872,-13.104 h2.49
  text "G" at 6.559,-13.44 h2.49
  text "N" at 8.161,-13.44 h2.49
  text "D" at 9.763,-13.44 h2.49
  text "G" at -31.444,-13.568 h2.49
  text "N" at -29.842,-13.568 h2.49
  text "D" at -28.24,-13.568 h2.49
  text "V" at 44.273,-15.507 h2.49
  text "3" at 45.874,-15.507 h2.49
  text "V" at 46.996,-15.507 h2.49
  text "/" at 48.598,-15.507 h2.49
  text "5" at 49.238,-15.507 h2.49
  text "V" at 50.36,-15.507 h2.49
  text "V" at 17.349,-15.634 h2.49
  text "3" at 18.95,-15.634 h2.49
  text "V" at 20.072,-15.634 h2.49
  text "/" at 21.674,-15.634 h2.49
  text "5" at 22.314,-15.634 h2.49
  text "V" at 23.436,-15.634 h2.49
  text "V" at 29.287,-15.667 h2.49
  text "3" at 30.888,-15.667 h2.49
  text "V" at 32.01,-15.667 h2.49
  text "/" at 33.612,-15.667 h2.49
  text "5" at 34.252,-15.667 h2.49
  text "V" at 35.374,-15.667 h2.49
  text "3" at 8.651,-16.003 h2.49
  text "V" at 9.773,-16.003 h2.49
  text "V" at -30.478,-16.131 h2.49
  text "I" at -28.876,-16.131 h2.49
  text "N" at -28.075,-16.131 h2.49
  text "G" at 32.183,-18.07 h2.49
  text "N" at 33.785,-18.07 h2.49
  text "D" at 35.387,-18.07 h2.49
  text "G" at 47.169,-18.07 h2.49
  text "N" at 48.771,-18.07 h2.49
  text "D" at 50.373,-18.07 h2.49
  text "G" at 20.245,-18.197 h2.49
  text "N" at 21.847,-18.197 h2.49
  text "D" at 23.449,-18.197 h2.49
  text "12V IN" at -36.195,-19.685 h1.52
  text "GND" at -12.319,-24.511 h1.52 r90
  text "GND" at -30.226,-30.226 h1.52 r180
  text "GND" at -25.4,-30.226 h1.52 r90
  text "5V" at -12.065,-32.258 h1.52 r90
  text "GND" at -11.811,-36.576 h1.52
Mechanical 15:
  lines w0.254: -38.076,-33.909 ccw(c-34.878,-33.909) -34.75,-37.104 ; -38.053,-33.909 -38.053,25.908 cw(c-34.306,25.971) -34.37,29.718 59.483,29.718 cw(c59.61,27.305) 62.023,27.178 62.023,-35.132 ; -35.052,-37.084 60.118,-37.084 ccw(c60.118,-35.179) 62.023,-35.179

## Text inside footprints (layer, text, board x,y; h text height)
P1: Top Overlay "1" at 12.827,22.86 h1.27 r270; Top Overlay "2" at 15.367,22.86 h1.27 r270; Top Overlay "29" at 12.827,-16.764 h1.27 r270; Top Overlay "30" at 15.367,-16.764 h1.27 r270